# EAGLE board FULLBRIDGE 2021 (EAGLE 9.6.2)
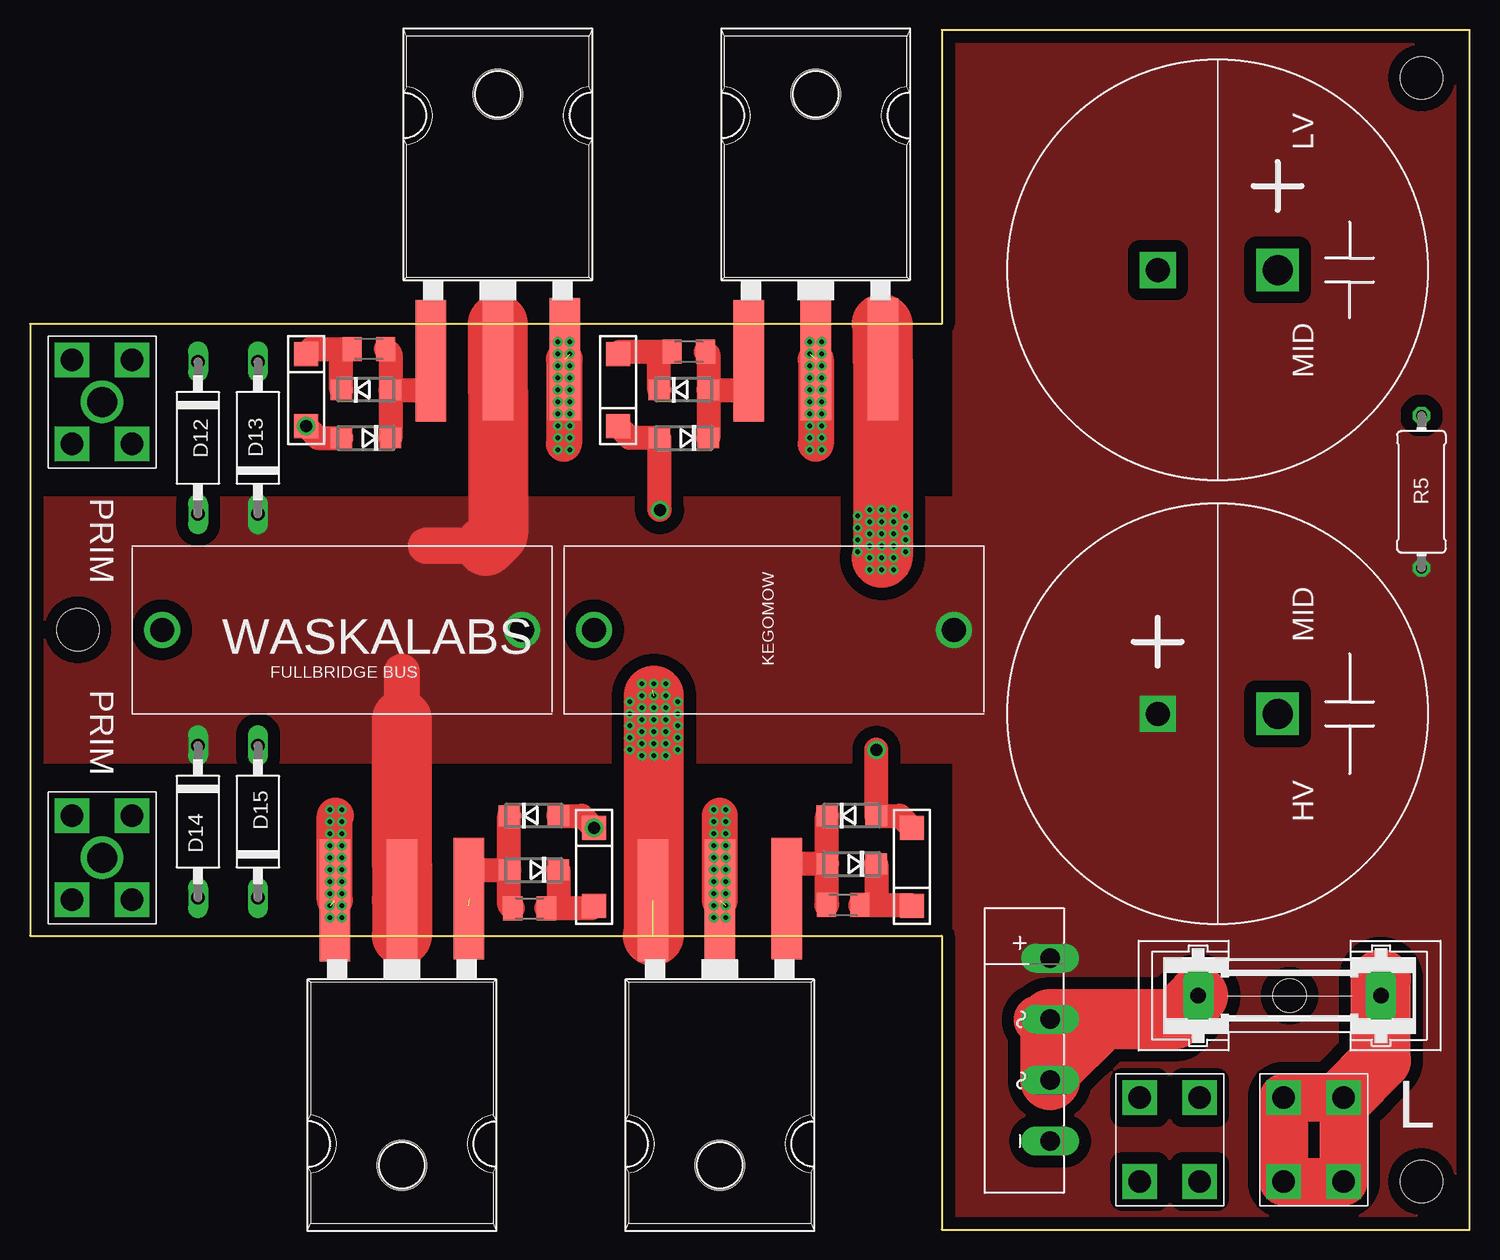
[diagram p0: board, top side]
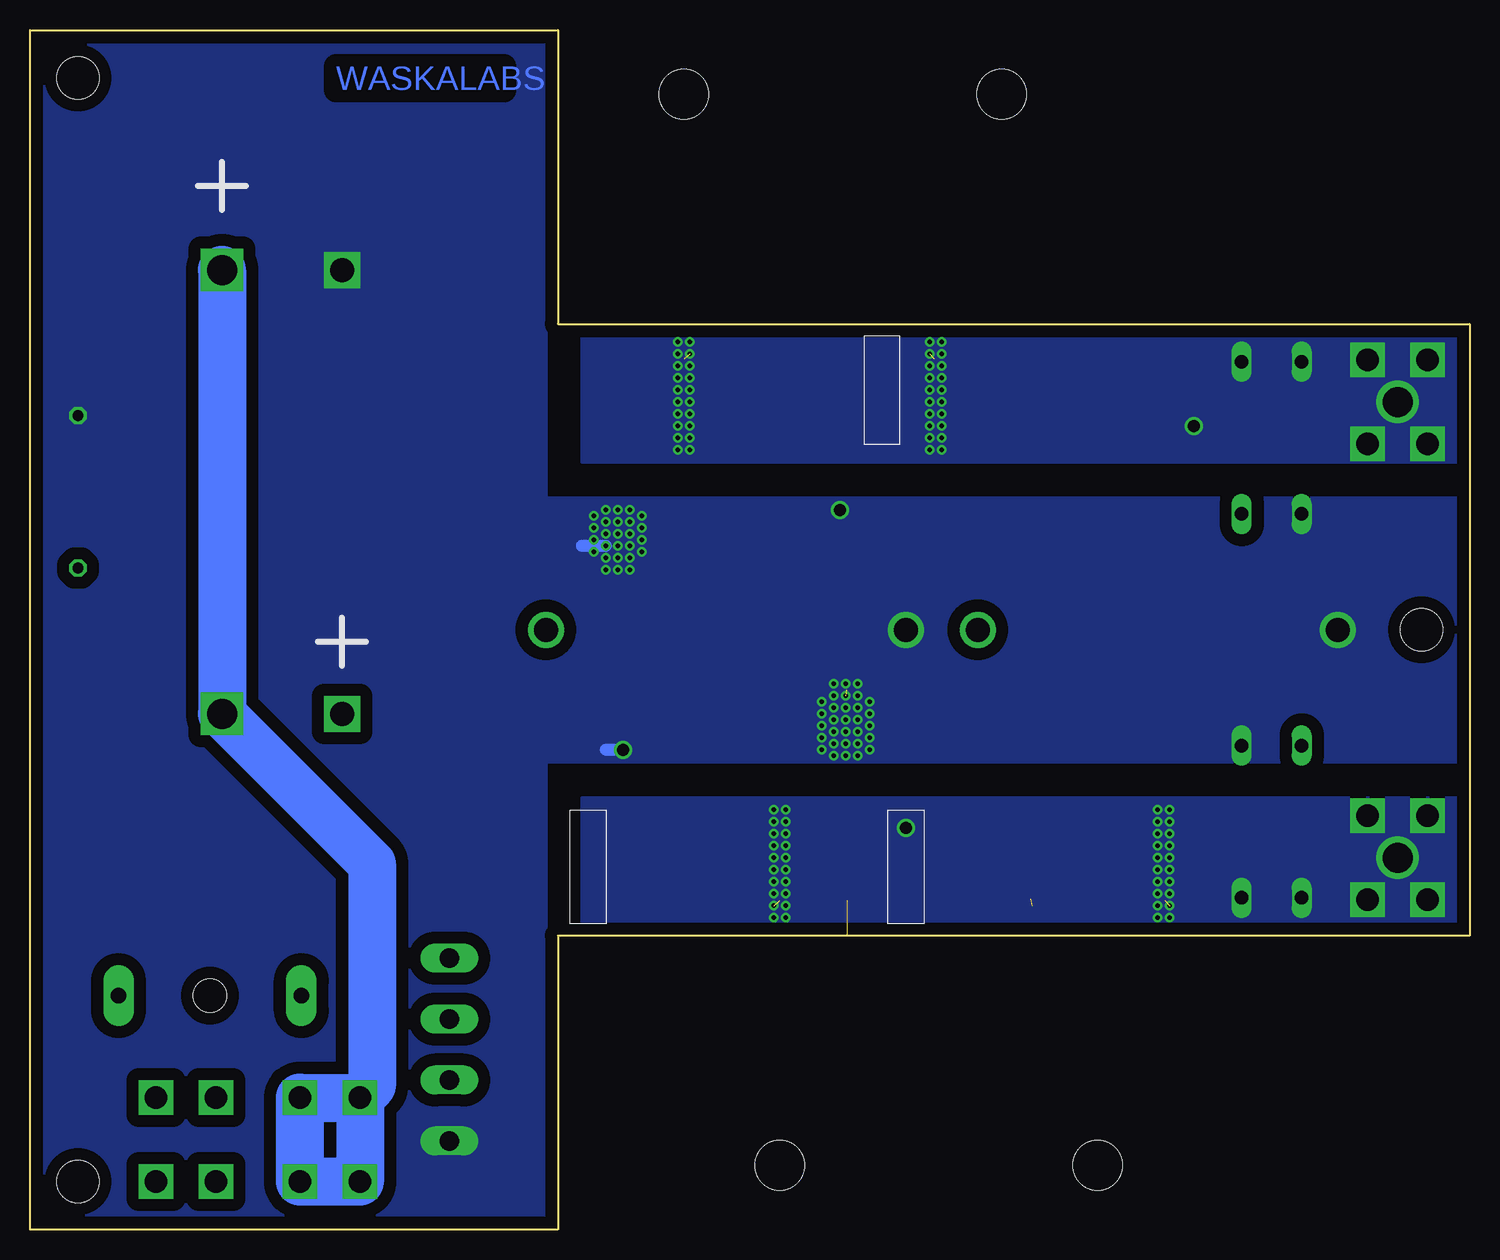
[diagram p1: board, bottom side, seen from below]

Size 120 x 100 mm. Coordinates in mm from the lower left corner, seen from the top.
Outline: 0,24.5 76,24.5 76,0 120,0 120,100 76,100 76,75.5 0,75.5 0,24.5
Copper layers (1*16): Top 0.035mm / dielectric 1.5mm / Bottom 0.035mm
Design rules "default *": minimum track width 6mil, minimum drill 0.35mm, track to track 6mil, track to pad 6mil, pad to pad 6mil, via to via 6mil, smd to smd 6mil, copper to edge 40mil, drill to drill 6mil, minimum pad ring 10mil, minimum via ring 8mil, stop-mask expansion 4mil, vias tented up to drill 20mil, thermal gap 0mil
Net classes: 1 POWER: width 0.254 mm, clearance 1.016 mm; 2 PWR2: clearance 0.508 mm
Holes 3.5 mm at 116,96 116,4 4,50

## Footprints (pad centres in the part's own frame; a part is rotated, then mirrored left to right if it is on the bottom)
TP20SQ = smd 2 x 2: TP 0,0
KBU = drill 1.6 long: + -7.62,2.54; - 7.62,2.54; AC1 -2.54,2.54; AC2 2.54,2.54
DO214AC = smd 1.8 x 1.7: A 2.05,0; C -2.05,0
DO15-12 = drill 1.118 long: A 6.35,0; C -6.35,0
GSH15 = drill 1.321 pad 2.54 long: 1 -7.62,0; 2 7.62,0 | hole 2.794: 0,0
7788 = drill 1.9 square: P$1 0,0; P$2 0,7; P$3 5,7; P$4 5,0
M1206 = smd 1.6 x 2: 1 -1.4,0; 2 1.4,0
0411/12 = drill 0.914 octagon: 1 -6.35,0; 2 6.35,0
CHINESEMKP = drill 1.3 square: P$1 2.5,7; P$2 32.5,7
TO247BH = smd 2.54 x 10.16: D 0,-12.954; G -5.588,-13.081; S 5.588,-12.954 | hole 4.115: 0,9.144

## Placement (x,y rotation side)
AP1  TPTP20SQ  [TP20SQ]  23,67 0 top
AP2  TPTP20SQ  [TP20SQ]  73.5,33.5 0 top
AP3  TPTP20SQ  [TP20SQ]  47,27 0 top
AP4  TPTP20SQ  [TP20SQ]  49,73 0 top
B2  KBU-1010  [KBU]  82.5,15 270 top
D2  SMAJ26CA  [DO214AC]  28,66 180 top
D3  SMAJ26CA  [DO214AC]  54.5,66 180 top
D4  SS14-E3/5AT  [DO214AC]  28,70 0 top
D5  SS14-E3/5AT  [DO214AC]  54.5,70 0 top
D6  SMAJ26CA  [DO214AC]  42,34.5 0 top
D7  SS14-E3/5AT  [DO214AC]  68.5,30.5 180 top
D8  SMAJ26CA  [DO214AC]  68.5,34.5 0 top
D10  SS14-E3/5AT  [DO214AC]  42,30 180 top
D12  440V TVS  [DO15-12]  14,66 270 top
D13  440V TVS  [DO15-12]  19,66 90 top
D14  440V TVS  [DO15-12]  14,34 270 top
D15  440V TVS  [DO15-12]  19,34 90 top
F1  20X5  [GSH15]  105,19.5 0 top
LIVE  KEY7788  [7788]  104.5,4 0 top
NEUTRAL  KEY7788  [7788]  92.5,4 0 top
PH1  TPTP20SQ  [TP20SQ]  23,73 0 top
PH2  TPTP20SQ  [TP20SQ]  73.5,27 270 top
PH3  TPTP20SQ  [TP20SQ]  47,33.5 0 top
PH4  TPTP20SQ  [TP20SQ]  49,67 0 top
R1  [M1206]  28.25,73.41 0 top
R2  [M1206]  54.92,73.17 0 top
R3  [M1206]  41.64,26.77 180 top
R4  [M1206]  67.79,27.05 0 top
R5  100K 2W  [0411/12]  116,61.5 90 top
U$1  KEY7788  [7788]  8.5,72.5 180 top
U$2  KEY7788  [7788]  8.5,34.5 180 top
U$3  CHINEMKP  [CHINESEMKP]  79.5,57 180 top
U$4  CHINEMKP  [CHINESEMKP]  43.5,57 180 top
U$5  FGA60N65SMD_SMD  [TO247BH]  57.5,14.5 180 top
U$6  FGA60N65SMD_SMD  [TO247BH]  65.5,85.5 0 top
U$7  FGA60N65SMD_SMD  [TO247BH]  39,85.5 0 top
U$8  FGA60N65SMD_SMD  [TO247BH]  31,14.5 180 top

## Library data of the parts
AP1-AP4 PH1-PH4 = testpad
B2 = rectifier
D2-D8 D10 D12-D15 = diode
F1 = fuse; MPN: 64900001039; OC_FARNELL: 1271673; OC_NEWARK: 02P0318
LIVE NEUTRAL U$1 U$2 = KETYSTONE 7788 M3 SCREW TERMINAL
R1-R5 = adafruit
U$3 U$4 = CHINESE MKP HIBO
U$5-U$8 = FGA60N65SMD_SMD

## Nets
A+ [POWER]: D7.C PH2.TP R4.2
B- [POWER]: AP4.TP D5.C R2.1
D+ [POWER]: D4.C PH1.TP R1.1
GND [POWER]: AP2.TP B2.- D3.A D8.A D12.A D15.A PH4.TP R5.2 U$3.P$2 U$4.P$2 U$5.S U$6.S
GND1 [POWER]: AP3.TP D10.C R3.1
MID: NEUTRAL.P$1 NEUTRAL.P$2 NEUTRAL.P$3 NEUTRAL.P$4
N$4: F1.2 LIVE.P$1 LIVE.P$2 LIVE.P$3 LIVE.P$4
N$5 [POWER]: D6.C D10.A R3.2 U$8.G
N$9: B2.AC1 B2.AC2 F1.1
N$16 [POWER]: D3.C D5.A R2.2 U$6.G
N$19 [POWER]: D2.C D4.A R1.2 U$7.G
N$21 [POWER]: D7.A D8.C R4.1 U$5.G
PRIM1 [POWER]: AP1.TP D2.A D12.C D13.A U$1.P$1 U$1.P$2 U$1.P$3 U$1.P$4 U$6.D U$7.S
PRIM2 [POWER]: D6.A D14.A D15.C PH3.TP U$2.P$1 U$2.P$2 U$2.P$3 U$2.P$4 U$5.D U$8.S
VCC [POWER]: B2.+ D13.C D14.C R5.1 U$3.P$1 U$4.P$1 U$7.D U$8.D

## Tracks (layer width: path | path; a pad name or v marks a point on that pad's centre or on a via)
A+
  Top 1: 70.55,27.05 R4.2 69.19,27 PH2.TP
  Top 2: D7.C 70.55,27.05 | R4.2 73.45,27.05 PH2.TP
B-
  Top 1: D5.C 52.45,73 | 53.31,73.17 R2.1 | AP4.TP 52.45,73 | 52.45,73 52.45,73.17
  Top 2: AP4.TP 49.17,73.17 52.45,73.17 | 52.45,73.17 53.31,73.17 | D5.C 52.45,73.17
D+
  Top 1: 25.95,73 25.95,73.41 26.63,73.41 R1.1 26.44,73 25.95,73
  Top 2: D4.C 25.95,73 | PH1.TP 23.41,73.41 26.63,73.41
GND  (via drill 0.35, 1, 2)  (2 unrouted)
  Top 0.1: U$5.S 52,27.45
  Top 1: v70.55,40 70.5,40
  Top 2: v52.5,60 52.45,60.05 D3.A 50,66 PH4.TP | v70.55,40 D8.A 72.5,34.5 AP2.TP
  Top 3: 51.91,45 52,45
  Top 5: 51.91,24.5 52,24.5 v52,44.5 | v71,56 71.09,56.09 U$6.S 71.09,75.41 71,75.5
  Bottom 1: v70.55,40 72,40 | v72,57 74,57
  other vias: 52,42.5 53,43.5 52,43.5 51,44.5 51,45.5 52,45.5 51,43.5 51,42.5 53,42.5 53,44.5 53,45.5 71,55 70,55 72,55 70,56 70,57 70,58 71,58 72,58 72,56 71,57 94,80 11,50 47,50 51,41.5 51,40.5 51,39.5 52,39.5 52,40.5 52,41.5 53,41.5 53,40.5 53,39.5 50,44 50,43 50,42 50,41 50,40 54,44 54,43 54,42 54,41 54,40 70,59 70,60 71,60 71,59 72,59 72,60 73,59.5 73,58.5 73,57.5 73,56.5 69,56.5 69,57.5 69,58.5 69,59.5
  pour Bottom: -1,61 77,61 77,100 120,100 120,0 77,0 77,39 -1,39
GND1
  Top 1: R3.1 43.06,26.77 43.5,26.77 | 43.5,26.77 44.05,26.77 | AP3.TP 43.5,27 43.5,26.77
  Top 2: AP3.TP 46.77,26.77 44.05,26.77 | 44.05,26.77 43.06,26.77 | D10.C 44.05,26.77
MID  (via drill 2.5)
  Bottom 4: v104,80 v104,43 91.5,30.5 91.5,12 NEUTRAL.P$2 | NEUTRAL.P$2 NEUTRAL.P$1 NEUTRAL.P$4 NEUTRAL.P$3 NEUTRAL.P$2
N$4
  Top 4: LIVE.P$3 110.5,12 | 112.62,14.12 F1.2 112.62,20.88 112.5,21 | LIVE.P$3 LIVE.P$2 LIVE.P$1 LIVE.P$4 LIVE.P$3
  Top 5: LIVE.P$3 112.62,14.12 112.62,20.88
N$5  (1 unrouted)
  Top 1: 40.24,30 D10.A 37,30 37,29.5 | D6.C 40.24,34.5 | 36.5,27 36,27 36,28.5
  Top 2: R3.2 39.95,27.07 D10.A | D10.A D6.C | U$8.G 36.59,30 D10.A
N$9
  Top 3: B2.AC1 91.04,17.54 91.25,17.75
  Top 4: F1.1 95.38,17.5 90.08,17.5 | 90.08,17.5 84,17.5 | B2.AC2 90.08,17.5
  Top 5: B2.AC2 B2.AC1 95.42,17.54 F1.1
N$16
  Top 1: 59.91,70 U$6.G | R2.2 56.55,73.17 D5.A D3.C
  Top 2: R2.2 56.55,72.94 D3.C | D5.A 59.91,70
N$19
  Top 1: 33.41,70 U$7.G | R1.2 30.05,73.41 D4.A D2.C
  Top 2: R1.2 30.05,73.01 D2.C | D4.A 33.41,70
N$21
  Top 1: U$5.G 63.09,30.5 | R4.1 66.45,27.05 D7.A D8.C
  Top 2: R4.1 66.45,27.1 D8.C | D7.A 63.09,30.5
PRIM1  (via drill 0.35, 1, 2.5)  (2 unrouted)
  Top 1: D2.A 24.5,66 23.5,67
  Top 2: AP1.TP 24,66 D2.A
  Top 3: U$7.S 44.5,72.55 44.5,65.5 | U$6.D 65.5,65.5
  other vias: 44,73 44,74 45,74 45,73 45,72 44,72 44,71 45,71 45,70 44,70 44,69 45,69 45,68 44,68 65,74 66,74 66,73 65,73 65,72 66,72 66,71 65,71 65,70 66,70 66,69 65,69 65,68 66,68 6,69 23,67 44,67 44,66 44,65 45,65 45,66 45,67 65,67 65,66 65,65 66,65 66,66 66,67
  pour Bottom: 0,76 74,76 74,64 0,64
PRIM2  (via drill 0.35, 1, 2.5)  (2 unrouted)
  Top 2: D6.A 46,34.5 PH3.TP
  Top 3: U$8.S 25.41,34.5 25.5,34.5 | U$5.D 57.5,34.5
  other vias: 26,32 25,32 25,31 26,31 26,30 25,30 25,29 26,29 26,28 25,28 25,27 26,27 26,26 25,26 57,32 57,31 57,30 57,29 57,28 57,27 57,26 58,26 58,27 58,28 58,29 58,30 58,31 58,32 6,31 47,33.5 25,33 25,34 25,35 26,35 26,34 26,33 57,33 58,33 58,34 57,34 57,35 58,35
  pour Bottom: 0,24 0,36 74,36 74,24
VCC  (via drill 2)
  Top 3: U$7.D 39,70 | 38,57 33,57 | U$8.D 31,30.5 | 31,42.5 31,46.5
  Top 5: 31,27.5 31,30.5 31,42.5 | 39,73 39,70 39,58 38,57 | U$8.D 31,24.5 | U$7.D 39,75.5
  other vias: 94,43 41,50 77,50
  pour Top: -1,39 77,39 77,0 120,0 120,100 77,100 77,61 -1,61

## Text on the board
Bottom: WASKALABS
tPlace: LV | MID | PRIM | MID | WASKALABS | KEGOMOW | FULLBRIDGE BUS | PRIM | HV | L